# Altium PCB PCB1.PcbDoc (part 2 of 2)
Units mil, origin at the board's own origin, x right, y up, seen from the top; angles counter-clockwise.
Board outline 4130.42 x 3475.43 mil, 4 copper layers (Top Layer, Int1 (GND), Int2 (PWR), Bottom Layer), stack 53.912 mil thick; 60 components, 38 nets, 205 pads, 89 vias.
Unrouted connection lines stored in the file: 39.
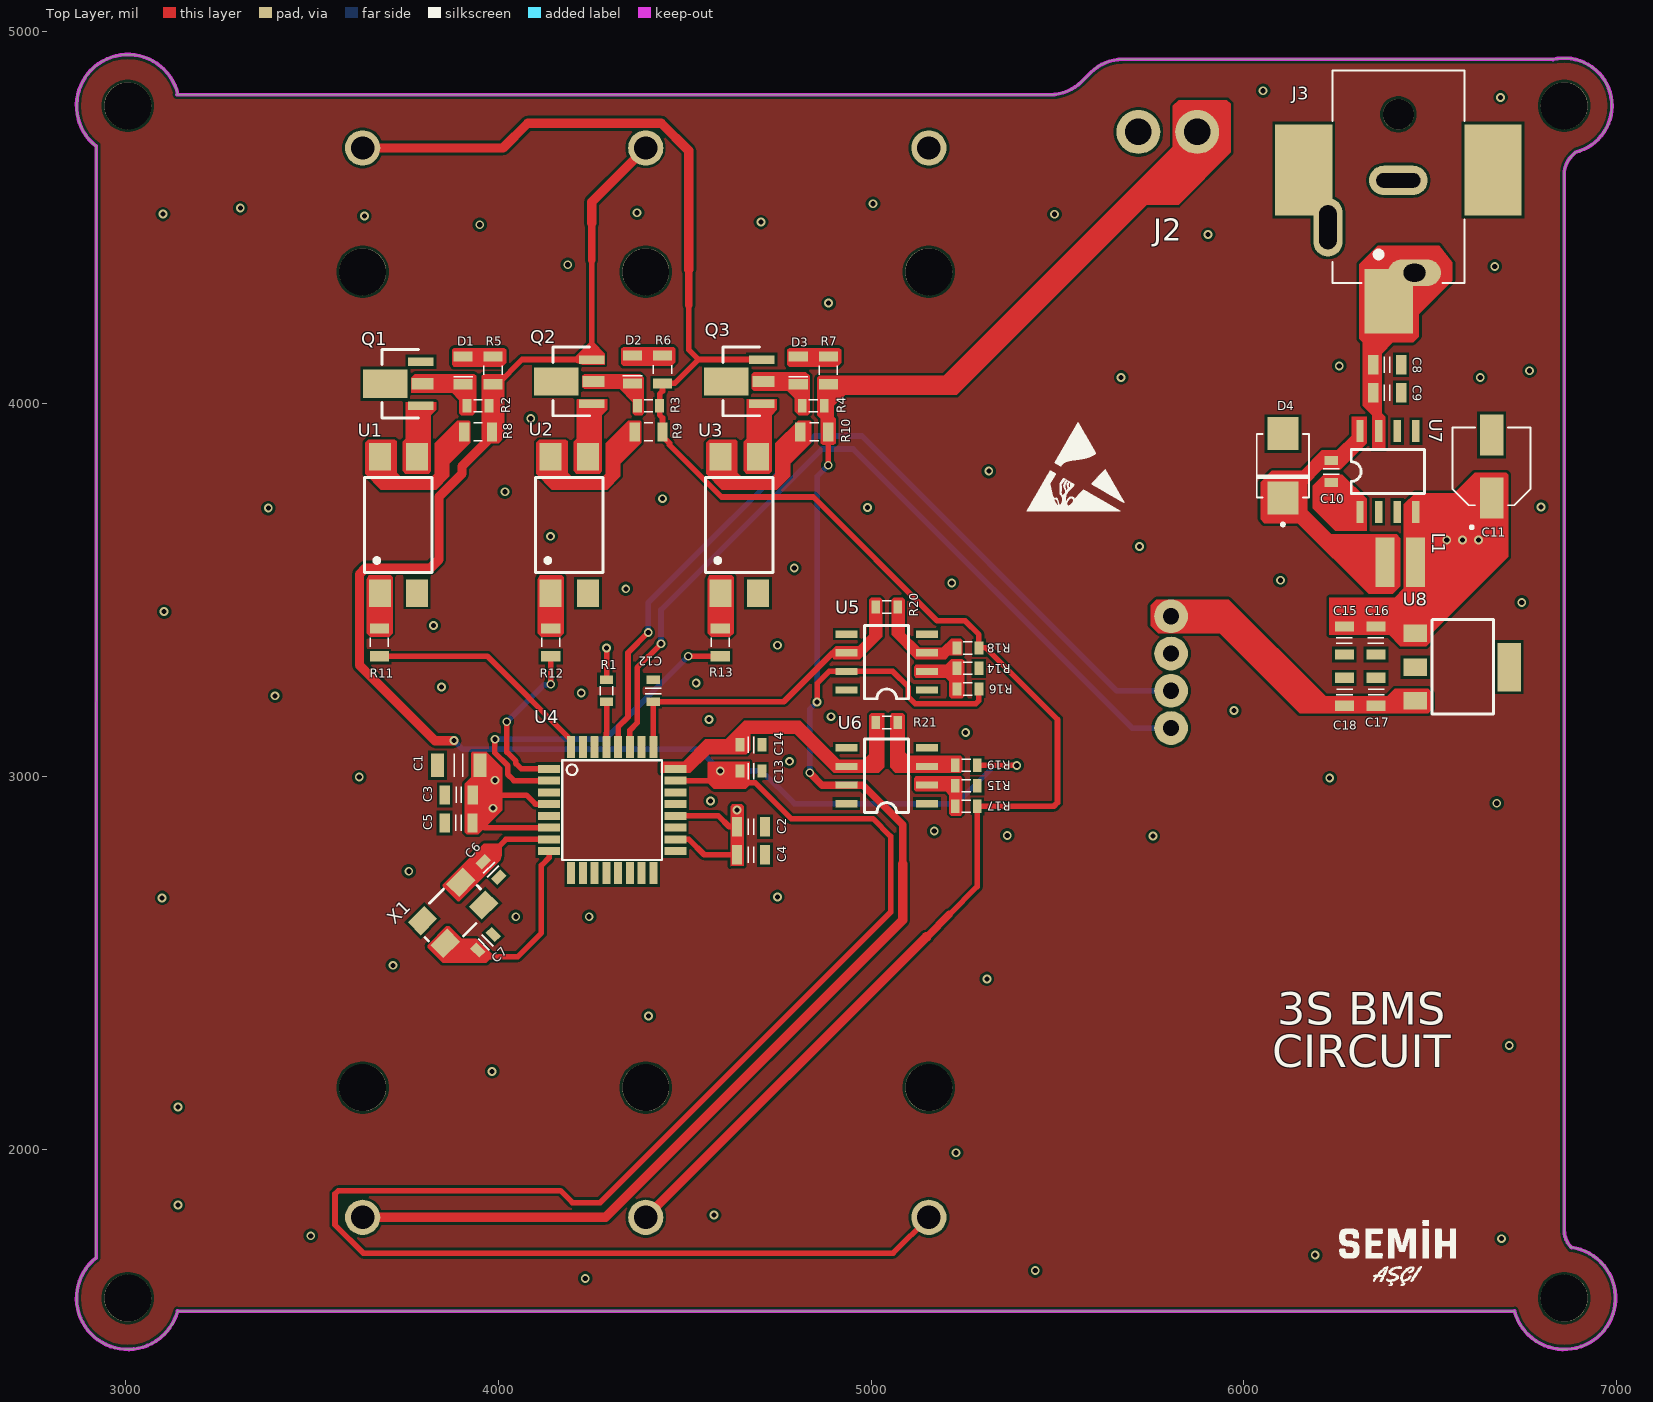
[diagram p0: Top Layer view]

## Via types
v1: diameter 23.62, hole 13.78, Top Layer to Int1 (GND), 70 vias
v2: diameter 23.62, hole 13.78, Top Layer to Bottom Layer, 12 vias
v3: diameter 23.62, hole 13.78, Top Layer to Int2 (PWR), 7 vias

## Nets (pads, with @x,y where several pads share a name; then routed paths per layer and width w, separated by ;. In a path a pad name is that pad's centre, name@x,y a point inside that pad or via, vN(x,y) a via of type N, cw(c..) or ccw(c..) an arc to the next point about the centre after c; other vN are vias at no path point) (continued)
NetC13_2: (continued)
  Top Layer w20: 4250,4385 4250,4485
  Top Layer w25: v2(3880.17,3096.18) 3829.2,3096.18 3626.56,3298.82 3626.56,3543.08 3642.99,3559.5 3817.11,3559.5 3840.14,3582.53 3840.14,3750.5 3901.91,3812.27 3901.91,3832.69 3982.4,3913.19 R8.2 ; 4250,4485 4250,4541.85 J1.2-
  Bottom Layer w15: v2(3880.17,3096.18) 3903.29,3073.06 4536.94,3073.06 v2(4595,3015) 4705.96,3015 4793.82,2927.14 5228.5,2927.14 5331.12,3029.76 v2(5390.91,3029.76)
NetC14_2: C14.2 R21.2 U4.24 U6.6
NetD1_1: D1.1 Q1.2 R2.1
NetD1_2: D1.2 R5.1
NetD2_1: D2.1 Q2.2 R3.1
NetD2_2: D2.2 R6.1
NetD3_1: D3.1 Q3.2 R4.1
NetD3_2: D3.2 R7.1
NetJ1_2+: J1.2+ J1.3- Q3.3 R3.2 R6.2 R9.2 R17.1 R18.1 | length 5260
  Top Layer w15: 4510,4265 4510,4145.7 4536.65,4119.06 ; Q3.3 4536.65,4119.06 ; 5210,2630 5284.53,2704.53 R17.1 5490,2920 5500,2930 5500,3152.87 5307.87,3345 R18.1 5289.06,3380.95 5252,3418 5177,3418 4845,3750 4598.56,3750 4458.73,3889.83 4458.73,3894.46 4440,3913.19 R9.2 4440,3962.41 4432.13,3970.28 R3.2 4432.13,4026.35 4440,4034.22 R6.2 4472.59,4055 4536.65,4119.06
  Top Layer w20: 4510,4265 4510,4360 ; 5150,2570 5210,2630
  Top Layer w25: J1.3- 4011.81,4686.85 4078.56,4753.59 4436.41,4753.59 4510,4680 4510,4360 ; J1.2+ 5148.23,2570 5150,2570
NetJ1_3+: J1.3+ J2.1 R4.2 R7.2 R10.2 R16.1 U5.7 U6.7 | length 3862.9
  Top Layer w15: v2(4855,3200) 4855,3250 4886.97,3281.97 U5.7 5058.03,3281.97 5100,3240 5100,3213.79 5118.79,3195 5280.27,3195 5289.06,3203.79 R16.1 ; R10.2 v2(4884.8,3835.2) v2@4885,3835
  Top Layer w20: v2(4835,3010) 4868.03,2976.97 U6.7 4978.03,2976.97 5085,2870 5085,2765
  Top Layer w25: J1.3+ 4286.77,1816.77 5085,2615 5085,2765
  Bottom Layer w15: v2(4835,3010) 4835,3180 v2(4855,3200) 4855,3805.39 v2(4884.8,3835.2)
NetLCD_3: LCD.3 U4.28 | length 2292.6
  Top Layer w15: U4.28 4320.75,3132.49 4347.31,3159.05 4347.31,3332.04 v2(4401.55,3386.28)
  Bottom Layer w15: v2(4401.55,3386.28) 4401.55,3466.32 4849.07,3913.84 4974.89,3913.84 5658.73,3230 LCD.3
NetLCD_4: LCD.4 U4.27 | length 2260.8
  Top Layer w15: U4.27 4352.24,3124.16 4372.03,3143.95 4372.03,3292.24 v2(4435.87,3356.08)
  Bottom Layer w15: v2(4435.87,3356.08) 4435.87,3447.16 4867.73,3879.02 4951.63,3879.02 5700.65,3130 LCD.4
NetQ1_1: Q1.1 U1.3
NetQ2_1: Q2.1 U2.3
NetQ3_1: Q3.1 U3.3
NetR1_2: R1.2 U4.29 | length 121.5
  Top Layer w15: U4.29 4289.25,3115.82 4290,3116.57 R1.2
NetR8_1: R8.1 U1.4
NetR9_1: R9.1 U2.4
NetR10_1: R10.1 U3.4
NetR11_1: R11.1 U4.32 | length 626.5
  Top Layer w15: R11.1 3970.16,3322.6 4194.76,3097.99 U4.32
NetR11_2: R11.2 U1.1
NetR12_1: R12.1 U4.1 | length 452.4
  Top Layer w15: v2(4021.97,3146.74) 4021.97,3146.59 4022.12,3146.44 4022.12,3065.54 4046.5,3041.16 4046.5,3034.75 4061.01,3020.24 U4.1 ; R12.1 4140,3247.57 v2(4140.09,3247.48)
  Bottom Layer w15: v2(4021.97,3146.74) 4121.28,3246.05 4138.66,3246.05 v2(4140.09,3247.48)
NetR12_2: R12.2 U2.1
NetR13_1: R13.1 U4.2 | length 924.1
  Top Layer w15: v2(3990,3100) 3990,3063.51 4024.5,3029.01 4024.5,3005.5 4041.26,2988.74 U4.2 ; v2(4508.91,3322.54) 4508.97,3322.6 R13.1
  Bottom Layer w15: v2(3990,3100) 4286.37,3100 v2(4508.91,3322.54)
NetR13_2: R13.2 U3.1
NetR14_1: R14.1 R16.2 U5.2
NetR15_1: R15.1 R17.2 U6.2
NetR18_2: R18.2 R20.1 U5.3
NetR19_2: R19.2 R21.1 U6.3
pads on no net: J1. J3. Q1.4 Q2.4 Q3.4 U4.9 U4.10 U4.11 U4.12 U4.13 U4.14 U4.15 U4.16 U4.17 U4.19 U4.22 U4.26 U4.30 U4.31 U5.1 U5.5 U5.8 U6.1 U6.5 U6.8 U7.2 U7.3 U7.5

## Polygon pours and split planes (outlines as drawn)
GND on Bottom Layer "GND_L04_P000" (solid, pour order 0): 2958.53,4970.39 2870.31,4882.17 2870.31,4744.93 2926.67,4688.57 2918.09,4679.99 2918.09,1703.73 2866.63,1652.27 2866.63,1546.89 2951.17,1462.35 3059,1462.35 3117.81,1521.16 3126.39,1521.16 3126.39,1540.76 3149.68,1564.05 6725.11,1564.05 6739.81,1549.35 6739.81,1534.64 6805.97,1468.48 6897.86,1468.48 6900.32,1466.02 6916.25,1466.02 6998.35,1548.12 6998.35,1652.27 6918.71,1731.91 6888.07,1731.91 6868.46,1751.52 6868.46,4650.58 6910.12,4692.24 6923.6,4692.24 6989.77,4758.41 6989.77,4847.85 6921.14,4916.48 6913.8,4916.48 6901.55,4928.73 6803.53,4928.73 6802.3,4927.5 5626.01,4927.5 5527.99,4829.48 3147.23,4829.48 3141.1,4835.61 3141.1,4863.79 3092.09,4912.8
no net on Top Layer "NONET_L01_P001" (solid, pour order 1): 2953.79,4970.39 2865.57,4882.17 2865.57,4744.93 2921.93,4688.57 2913.35,4679.99 2913.35,1703.73 2861.89,1652.27 2861.89,1546.89 2946.43,1462.35 3054.26,1462.35 3113.07,1521.16 3121.65,1521.16 3121.65,1540.76 3144.94,1564.05 6720.37,1564.05 6735.07,1549.35 6735.07,1534.64 6801.23,1468.48 6893.12,1468.48 6895.58,1466.02 6911.51,1466.02 6993.61,1548.12 6993.61,1652.27 6913.97,1731.91 6883.33,1731.91 6863.72,1751.52 6863.72,4650.58 6905.38,4692.24 6918.86,4692.24 6985.03,4758.41 6985.03,4847.85 6916.4,4916.48 6909.06,4916.48 6896.81,4928.73 6798.79,4928.73 6797.56,4927.5 5621.27,4927.5 5523.25,4829.48 3142.49,4829.48 3136.36,4835.61 3136.36,4863.79 3087.35,4912.8
GND on Int1 (GND) (split plane): 438 vertices, not listed, extent 2887.21,1482.21 6977.79,4917.79
+5VDC on Int2 (PWR) (split plane): 438 vertices, not listed, extent 2887.21,1482.21 6977.79,4917.79

## Keep-outs
Keep-Out Layer:
  lines w10: 2919.33,1707.93 ccw(c3005,1600) 3138.39,1565.42 ; 2919.62,4691.85 cw(c3005,4800) 3139.36,4830.58 ; 2919.99,1707.1 2920.43,4692.88 ; 3136.82,4830 5480,4830 ccw(c5480,4950.71) 5565.36,4865.36 5589.64,4889.64 cw(c5675,4804.29) 5675,4925 6830,4925 ; 3140,1565 6725,1565 ; 6726.61,1565.42 ccw(c6860,1600) 6880.19,1736.31 ; 6830.09,4924.62 cw(c6860,4800) 6889.91,4675.38 ; 6880,1735 cw(c6928.28,1783.28) 6860,1783.28 6860,1785 6860,4615 cw(c6932.42,4615) 6881.21,4666.21 6890,4675

## Other copper
Top Layer:
  region net NetC13_2: 4674.4,3039.47 4674.4,2978.08 4662.84,2966.52 4577.53,2966.52 4561.19,2982.86 4561.19,3037.07 4563.19,3039.07
  region net +5VDC: 4657.5,2760.86 4622.5,2759.14 4622.5,2920 4627.5,2925 4652.5,2925 4657.5,2920
  region net +5VDC: 3926.72,3062.06 3926.72,2998.44 3909.14,2980.86 3909.14,2850.86 3915,2845 3945,2845 4010,2910 4010,3023 3966.96,3066.04 3929.18,3066.04
  region net 3V3DC: 5750,3405 5770,3385 5935,3385 6150,3170 6495,3170 6505,3180 6505,3225 6495,3235 6405,3235 6385,3215 6220,3215 5960,3475 5765,3475 5750,3460 5750,3445
  region net NetD2_1: 4225,4075 4225,4045 4230,4040 4325,4040 4360,4005 4360,3975 4365,3970 4385,3970 4390,3975 4390,4070 4380,4080 4230,4080
  region net NetD3_1: 4680,4080 4680,4040 4685,4035 4775,4035 4795,4015 4795,3980 4805,3970 4830,3970 4835,3975 4835,4010 4835,4020 4835,4030 4835,4075 4825,4085 4685,4085
  region net NetD3_2: 4774.61,4145 4774.61,4105 4779.61,4100 4909.61,4100 4919.61,4110 4919.61,4145 4914.61,4150 4779.61,4150
  region net NetD2_2: 4329.61,4147.4 4329.61,4107.4 4334.61,4102.4 4464.61,4102.4 4474.61,4112.4 4474.61,4147.4 4469.61,4152.4 4334.61,4152.4
  region net NetD1_2: 3875,4145 3875,4105 3880,4100 4010,4100 4020,4110 4020,4145 4015,4150 3880,4150
  region net NetD1_1: 3765,4070 3775,4080 3935,4080 3940,4075 3940,3980 3930,3970 3900,3970 3895,3975 3895,4010 3875,4030 3765,4030
  region net NetR10_1: 4641.06,3900 4641.06,3815 4656.06,3800 4731.06,3800 4743.06,3812 4743.06,3894 4804.06,3955 4836.06,3955 4839.06,3952 4839.06,3896 4783.06,3840 4783.06,3806 4747.06,3770 4599.06,3770 4557.06,3812 4557.06,3896 4565.06,3904 4636.06,3904
  region net NetQ3_1: 4666.06,4011 4666.06,3907 4658.06,3899 4658.06,3820 4665.06,3813 4727.06,3813 4733.06,3819 4733.06,3970 4747.06,3984 4747.06,4012 4666.73,4012
  region net NetQ1_1: 3751.06,4005 3751.06,3907 3743.06,3899 3743.06,3820 3750.06,3813 3812.06,3813 3818.06,3819 3818.06,3970 3832.06,3984 3832.06,4005
  region net NetR8_1: 3726.06,3900 3726.06,3815 3741.06,3800 3816.06,3800 3828.06,3812 3828.06,3894 3889.06,3955 3921.06,3955 3924.06,3952 3924.06,3896 3868.06,3840 3868.06,3806 3832.06,3770 3684.06,3770 3642.06,3812 3642.06,3896 3650.06,3904 3721.06,3904
  region net NetC12_2: 5000,3480 5025,3480 5030,3475 5030,3375 4970,3315 4900,3315 4895,3320 4895,3340 4905,3350 4965,3350 4995,3380 4995,3475
  region net NetR13_2: 4561.06,3530 4561.06,3385 4571.06,3375 4621.06,3375 4631.06,3385 4631.06,3535 4626.06,3540 4566.06,3540
  region net NetR11_2: 3646.06,3530 3646.06,3385 3656.06,3375 3706.06,3375 3716.06,3385 3716.06,3535 3711.06,3540 3651.06,3540
  region net NetR12_2: 4105,3530 4105,3385 4115,3375 4165,3375 4175,3385 4175,3535 4170,3540 4110,3540
  region net NetR9_1: 4185,3900 4185,3815 4200,3800 4275,3800 4287,3812 4287,3894 4348,3955 4380,3955 4383,3952 4383,3896 4327,3840 4327,3806 4291,3770 4143,3770 4101,3812 4101,3896 4109,3904 4180,3904
  region net NetQ2_1: 4210,4011 4210,3907 4202,3899 4202,3820 4209,3813 4271,3813 4277,3819 4277,3970 4291,3984 4291,4012 4210.67,4012
  region net NetC13_2: 4225,4105 4285,4105 4285,4135 4255,4165 4245,4165 4205,4125 4218,4112 4204,4112
  region net NetC13_2: 3955,4075 3955,3905 3965,3895 4000,3895 4015,3910 4015,4080 3960,4080
  region net NetJ1_3+: 5965,4805 5965,4675 5825,4535 5740,4535 5230,4025 4930,4025 4900,3995 4900,3965 4905,3960 4905,3895 4900,3890 4870,3890 4865,3895 4865,3960 4855,3970 4855,4070 4860,4075 5195,4075 5810,4690 5810,4800 5825,4815 5955,4815
  region net NetR18_2: 5245,3365 5245,3325 5210,3325 5200,3315 5120,3315 5055,3380 5055,3475 5060,3480 5085,3480 5090,3475 5090,3385 5130,3345 5190,3345 5215,3370 5240,3370
  region net NetR14_1: 5115,3295 5115,3270 5120,3265 5200,3265 5210,3255 5210,3215 5215,3210 5245,3210 5250,3215 5250,3310 5245,3315 5215,3315 5200,3300 5120,3300
  region net NetC14_2: 4900,3010 5020,3010 5035,3025 5035,3170 5000,3170 4995,3165 4995,3060 4980,3045 4915,3045 4810,3150 4660,3150 4610,3100 4555,3100 4495,3040 4440,3040 4435,3035 4435,3010 4515,3010 4565,3060 4665,3060 4675,3070 4675,3115 4795,3115
  region net NetR15_1: 5240,3000 5120,3000 5115,2995 5115,2965 5120,2960 5200,2960 5210,2950 5210,2900 5215,2895 5240,2895 5245,2900 5245,2995
  region net NetR19_2: 5050.7,3163.99 5050.7,3024.3 5065,3010 5240,3010 5245,3015 5245,3050 5240,3055 5100,3055 5090,3065 5090,3165 5085,3170 5055,3170
  region net NetC7_2: 3809.6,2547.7 3810,2540 3850,2500 3967.4,2500 3984.91,2517.51 3984.91,2521.45 3983.85,2521.45 3940.6,2564.7 3900.9,2564.7 3867.8,2597.8 3859.7,2597.8
  region net NetC6_2: 4005,2775 4008.2,2788.58 4008.2,2810 3998.2,2820 3960,2820 3850,2710 3850,2705 3890,2665 3895,2665
  region net +5VDC: 6430,3730 6460,3760 6565,3760 6620,3815 6705,3815 6710,3810 6710,3590 6570,3450 6500,3380 6500,3360 6490,3350 6420,3350 6390,3380 6230,3380 6230,3480 6405,3480 6430,3505
  region net NetC10_1: 6215,3810 6185,3780 6185,3720 6245,3660 6330,3660 6330,3745 6265,3810 6225,3810
  region net NetC10_2: 6330,3965 6330,3895 6260,3825 6210,3825 6170,3785 6170,3715 6235,3650 6410,3650 6420,3640 6420,3510 6400,3490 6335,3490 6145,3680 6055,3680 6045,3690 6045,3790 6075,3820 6155,3820 6210,3875 6250,3875 6290,3915 6290,3965
  region net 12VDC: 6560,4380 6560,4330 6470,4240 6470,4180 6455,4165 6400,4165 6370,4135 6370,3975 6380,3965 6380,3880 6345,3880 6345,3970 6320,3995 6320,4165 6310,4175 6310,4375 6360,4425 6525,4425

## Silkscreen, mask and mechanical layers (free items; w line width, h text height)
Top Overlay:
  drawing of 2607 lines, arcs and shapes, not listed
  text "3S BMS" at 6089.64,2303.5 h150
  text "CIRCUIT" at 6075.97,2189.56 h150
Bottom Overlay:
  drawing of 2607 lines, arcs and shapes, not listed
  text "-" at 5651.05,4489.9 h300
  text "3S BMS" at 5986.86,2521.79 h150 r90
  text "18650" at 6141.1,2488.47 h150 r90
  text "+" at 5644.35,1758.03 h200